# Altium PCB 四进四出三电机.PcbDoc (part 2 of 3)
Units mm, origin at the board's own origin, x right, y up, seen from the top; angles counter-clockwise.
Board outline 122.4 x 87.4 mm, 2 copper layers (Top Layer, Bottom Layer); 150 components, 163 nets, 541 pads, 64 vias.
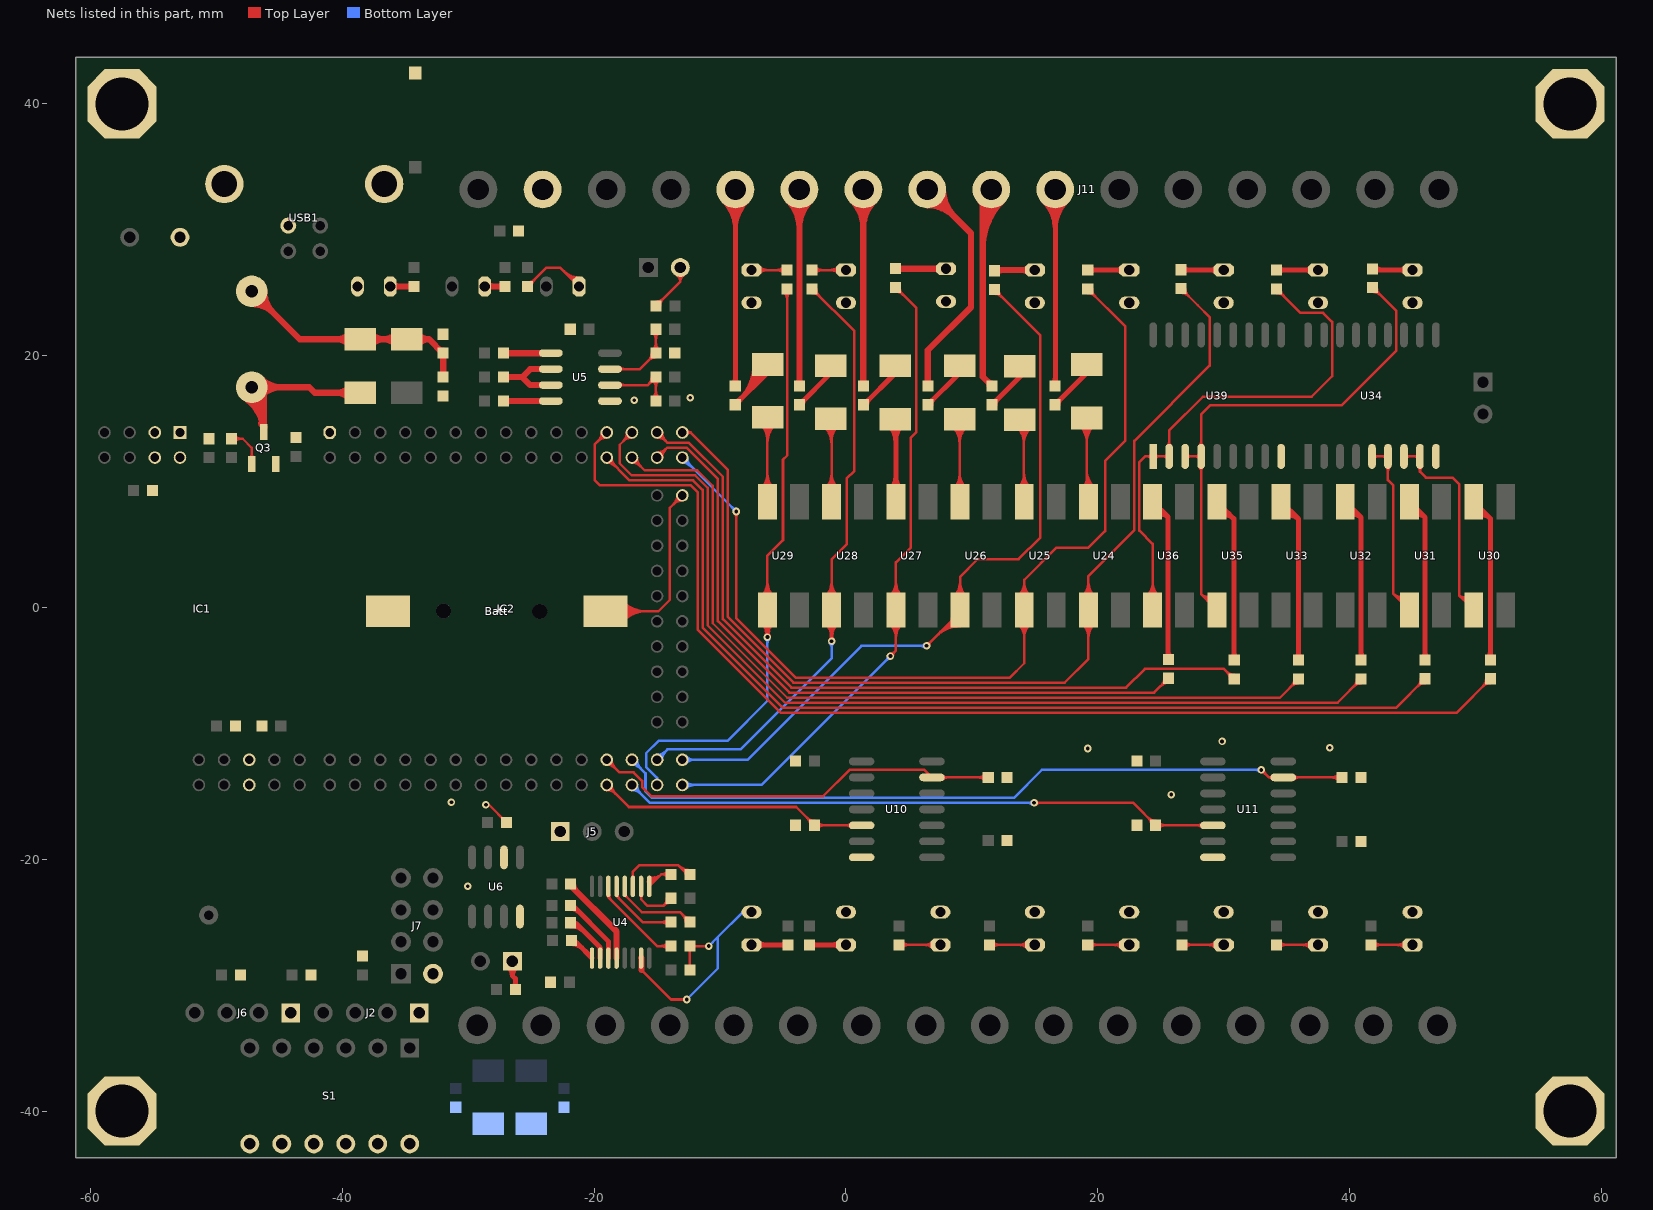
[diagram p2: the nets of this part, all layers, seen from the top]

## Via types
v1: diameter 0.6, hole 0.3, Top Layer to Bottom Layer, 64 vias

## Nets (pads, with @x,y where several pads share a name; then routed paths per layer and width w, separated by ;. In a path a pad name is that pad's centre, name@x,y a point inside that pad or via, vN(x,y) a via of type N, cw(c..) or ccw(c..) an arc to the next point about the centre after c; other vN are vias at no path point) (continued)
GND: Batt.2 C1.2 C2.2 C3.2 C4.2 C5.2 C6.2 C7.2 C8.2 C9.2 C18.2 C19.2 C20.2 C24.2 C25.1 C26.1 C27.2 C28.1 C29.1 D1.A D2.A IC1.2 IC1.4 IC1.5 IC2.1 J2.1 J5.1 J6.1 J7.1 LED1.K LED10.K LED11.K LED12.K LED13.K LED14.K LED15.K LED16.K LED17.K LED30.K LED31.K LED32.K LED33.K LED34.K LED35.K LED36.K LED37.K PAD1.1 PAD2.1 PAD3.1 PAD4.1 POWER.1 Q3.2 R11.2 R14.1 R43.2 R44.2 R45.2 R46.2 R47.2 R48.2 R49.2 R50.2 S1.7 S1.8 S1.9 S1.10 S1.11 S1.12 S2.2 U4.15 U5.5 U6.2 U6.8 U10.7 U11.7 U34.9 U39.9 USB1.4 USB1.5 USB1.6 | length 21.6
  Top Layer w0.2: v1(-28.6,-15.672) -28.372,-15.672 C28.1@-26.975,-17.069 ; -16.25,-28.784 -13.893,-31.14 v1(-12.649,-31.14) ; C3.2@-12.4,-28.8 C24.2@-12.4,-26.9 v1(-10.898,-26.9)
  Top Layer w0.5: U4.15@-16.275,-27.85 -16.25,-27.875 -16.25,-28.784
  Bottom Layer w0.2: v1(-12.649,-31.14) -10.185,-28.677 -10.185,-26.187 ; v1(-10.898,-26.9) -10.185,-26.187 ; LED10.K@-7.5,-24.2 -8.198,-24.2 -10.185,-26.187
  other v1: -30.048,-22.149 -31.344,-15.469 25.832,-14.859 19.202,-11.201 38.43,-11.151 29.87,-10.643 -16.815,16.459 -12.37,16.662
INPUT1: J11.7 R64.2 | length 24.9
  Top Layer w0.4: J11.7@15.701,32.281 cw(c13.46,30.04) 16.629,30.04 ; J11.7@15.984,32.564 cw(c14.426,31.006) 16.629,31.006 ; R64.2@16.43,17.77 ccw(c15.951,18.249) 16.629,18.249 ; R64.2@16.6,17.6 16.629,17.629 16.629,33.191 J11.7@16.62,33.2 ; 16.629,18.109 ccw(c17.109,18.109) R64.2@16.77,17.77 ; 16.629,30.083 cw(c19.737,30.083) J11.7@17.539,32.281 ; 16.629,31.049 cw(c18.771,31.049) J11.7@17.256,32.564
INPUT2: J11.8 R65.2 | length 27.1
  Top Layer w0.5: J11.8@10.656,32.316 cw(c10.137,31.797) 10.871,31.797 ; 10.871,28.568 cw(c16.172,28.568) J11.8@12.424,32.316 ; 10.871,29.775 cw(c14.965,29.775) J11.8@12.07,32.67 ; 10.871,30.982 cw(c13.758,30.982) J11.8@11.717,33.023 ; R65.2@11.41,17.6 ccw(c10.951,17.6) 11.276,17.924 ccw(c11.6,18.249) R65.2@11.6,17.79 ; J11.8@11.54,33.2 10.871,32.531 10.871,18.329 R65.2@11.6,17.6
INPUT3: J11.9 R66.2 | length 26.8
  Top Layer w0.5: R66.2@6.366,17.734 ccw(c6.041,18.059) 6.5,18.059 ccw(c6.959,18.059) R66.2@6.634,17.734 ; J11.9@6.46,31.95 cw(c6.46,28.932) 8.594,31.066 cw(c10.728,33.2) J11.9@7.71,33.2 ; J11.9@6.46,32.45 cw(c6.46,30.639) 7.74,31.92 cw(c9.021,33.2) J11.9@7.21,33.2 ; J11.9@6.46,33.2 9.931,29.729 9.931,23.851 6.5,20.419 R66.2@6.5,17.6
INPUT4: J11.10 R67.2 | length 23.6
  Top Layer w0.5: J11.10@0.496,32.316 cw(c-1.638,30.182) 1.38,30.182 cw(c4.398,30.182) J11.10@2.264,32.316 ; J11.10@0.85,32.67 cw(c-0.431,31.389) 1.38,31.389 cw(c3.191,31.389) J11.10@1.91,32.67 ; R67.2@1.38,17.62 J11.10@1.38,33.2 ; 1.38,18.107 ccw(c1.907,18.107) R67.2@1.534,17.734
INPUT5: J11.11 R68.2 | length 23.9
  Top Layer w0.5: J11.11@-4.584,32.316 cw(c-6.718,30.182) -3.7,30.182 cw(c-0.682,30.182) J11.11@-2.816,32.316 ; J11.11@-4.23,32.67 cw(c-5.511,31.389) -3.7,31.389 cw(c-1.889,31.389) J11.11@-3.17,32.67 ; R68.2@-3.834,17.734 ccw(c-4.159,18.059) -3.7,18.059 ccw(c-3.241,18.059) R68.2@-3.566,17.734 ; R68.2@-3.7,17.6 J11.11@-3.7,33.2
INPUT6: J11.12 R69.2 | length 24.9
  Top Layer w0.4: J11.12@-9.699,32.281 cw(c-11.918,30.062) -8.78,30.062 cw(c-5.642,30.062) J11.12@-7.861,32.281 ; J11.12@-9.416,32.564 cw(c-10.953,31.027) -8.78,31.027 cw(c-6.607,31.027) J11.12@-8.144,32.564 ; R69.2@-8.97,17.77 ccw(c-9.428,18.228) -8.78,18.228 ; R69.2@-8.8,17.6 -8.78,17.62 J11.12@-8.78,33.2 ; -8.78,18.131 ccw(c-8.269,18.131) R69.2@-8.63,17.77
IO1: IC2.58 R47.1 U10.5 | length 26.4
  Top Layer w0.2: IC2.58@-19,-14.5 cw(c-19,-15.466) -18.317,-14.783 cw(c-17.634,-14.1) IC2.58@-18.6,-14.1 ; IC2.58@-19,-14.1 -17.25,-15.85 -3.95,-15.85 R47.1@-2.5,-17.3 1.23,-17.3 U10.5@1.242,-17.312 ; R47.1@-2.84,-17.3 ccw(c-3.661,-17.3) -3.08,-16.72 ccw(c-2.5,-16.139) R47.1@-2.5,-16.96 ; R47.1@-2.26,-17.54 cw(c-1.679,-18.121) -1.679,-17.3 cw(c-1.679,-16.479) R47.1@-2.26,-17.06 ; 0.007,-17.3 cw(c0.007,-17.835) U10.5@0.386,-17.457 ; 0.065,-17.3 ccw(c0.065,-16.847) U10.5@0.386,-17.167
IO2: IC2.57 R48.1 U10.13 | length 36.5
  Top Layer w0.2: IC2.57@-19,-12.5 cw(c-19,-13.466) -18.317,-12.783 cw(c-17.634,-12.1) IC2.57@-18.6,-12.1 ; IC2.57@-19,-12.1 -17.994,-13.106 -16.862,-13.106 -16.2,-13.769 -16.2,-13.89 -16.2,-14.133 -16.2,-14.255 -15.469,-14.986 -1.809,-14.986 0.28,-12.897 6.225,-12.897 U10.13@6.83,-13.502 11.298,-13.502 R48.1@11.3,-13.5 ; U10.13@7.686,-13.647 cw(c8.036,-13.996) 8.036,-13.502 cw(c8.036,-13.008) U10.13@7.686,-13.357 ; 10.474,-13.502 ccw(c10.474,-12.674) R48.1@11.06,-13.26 ; 10.484,-13.502 cw(c10.484,-14.316) R48.1@11.06,-13.74
IO3: IC2.56 R49.1 U11.5 | length 53.9
  Top Layer w0.2: v1(14.935,-15.519) 22.819,-15.519 R49.1@24.6,-17.3 29.13,-17.3 U11.5@29.142,-17.312 ; v1@15.077,-15.661 cw(c15.418,-16.002) 15.418,-15.519 cw(c15.418,-15.037) v1@15.077,-15.378 ; R49.1@24.26,-17.3 ccw(c23.439,-17.3) 24.02,-16.72 ccw(c24.6,-16.139) R49.1@24.6,-16.96 ; R49.1@24.84,-17.54 cw(c25.421,-18.121) 25.421,-17.3 cw(c25.421,-16.479) R49.1@24.84,-17.06 ; 27.907,-17.3 cw(c27.907,-17.835) U11.5@28.286,-17.457 ; 27.965,-17.3 ccw(c27.965,-16.847) U11.5@28.286,-17.167
  Bottom Layer w0.2: IC2.56@-17,-14.5 cw(c-17,-15.466) -16.317,-14.783 cw(c-15.634,-14.1) IC2.56@-16.6,-14.1 ; IC2.56@-17,-14.1 -15.581,-15.519 v1(14.935,-15.519) ; v1@14.794,-15.661 ccw(c14.452,-16.002) 14.452,-15.519 ccw(c14.452,-15.037) v1@14.794,-15.378
IO4: IC2.55 R50.1 U11.13 | length 65.4
  Top Layer w0.2: v1@32.991,-13.1 cw(c32.991,-13.583) 33.333,-13.241 cw(c33.674,-12.9) v1@33.191,-12.9 ; v1(32.991,-12.9) 33.593,-13.502 ; U11.13@33.859,-13.63 ccw(c33.593,-13.841) 33.593,-13.502 ; U11.13@33.859,-13.374 cw(c33.593,-13.163) 33.593,-13.502 ; U11.13@35.586,-13.647 cw(c35.936,-13.996) 35.936,-13.502 cw(c35.936,-13.008) U11.13@35.586,-13.357 ; 38.574,-13.502 ccw(c38.574,-12.674) R50.1@39.16,-13.26 ; 38.584,-13.502 cw(c38.584,-14.316) R50.1@39.16,-13.74 ; R50.1@39.4,-13.5 39.398,-13.502 U11.13@34.73,-13.502 33.593,-13.502
  Bottom Layer w0.2: IC2.55@-17,-12.5 cw(c-17,-13.466) -16.317,-12.783 cw(c-15.634,-12.1) IC2.55@-16.6,-12.1 ; IC2.55@-17,-12.1 -15.926,-13.174 -15.926,-14.608 -15.415,-15.119 13.329,-15.119 15.548,-12.9 v1(32.991,-12.9) ; v1@32.85,-13.041 ccw(c32.509,-13.383) 32.509,-12.9 ccw(c32.509,-12.417) v1@32.85,-12.759
IO5: IC2.54 R28.1 U29.3 | length 60.9
  Top Layer w0.2: U29.3@-6.7,0.91 ccw(c-7.809,2.019) -6.24,2.019 ccw(c-4.671,2.019) U29.3@-5.78,0.91 ; U29.3@-6.685,-1.323 cw(c-7.654,-2.354) v1(-6.24,-2.354) cw(c-4.826,-2.354) U29.3@-5.795,-1.323 ; U29.3@-6.558,0.768 ccw(c-7.326,1.536) -6.24,1.536 ccw(c-5.154,1.536) U29.3@-5.922,0.768 ; U29.3@-6.548,-1.178 cw(c-7.219,-1.891) -6.24,-1.891 cw(c-5.261,-1.891) U29.3@-5.932,-1.178 ; v1@-6.413,-2.254 ccw(c-6.831,-2.012) -6.365,-1.887 ccw(c-5.899,-1.762) v1@-6.14,-2.181 ; v1@-6.381,-2.212 ccw(c-6.723,-1.871) -6.24,-1.871 ccw(c-5.757,-1.871) v1@-6.099,-2.212 ; v1@-6.34,-2.181 ccw(c-6.581,-1.762) -6.115,-1.887 ccw(c-5.649,-2.012) v1@-6.067,-2.254 ; v1(-6.24,-2.354) U29.3@-6.24,-0.2 -6.24,4.117 -5.004,5.353 -5.004,11.737 -4.65,12.09 -4.65,25.25 R28.1@-4.7,25.3 ; R28.1@-4.94,25.06 cw(c-5.642,24.358) -4.65,24.358 ; R28.1@-4.799,25.201 cw(c-5.159,24.841) -4.65,24.841 ; -4.65,24.6 cw(c-4,24.6) R28.1@-4.46,25.06
  Bottom Layer w0.2: IC2.54@-15.133,-13.723 ccw(c-15.2,-13.534) -15,-13.534 ; IC2.54@-15,-14.1 -15,-13.534 ; IC2.54@-14.867,-13.723 cw(c-14.8,-13.534) -15,-13.534 ; v1@-6.381,-2.495 cw(c-6.723,-2.837) -6.24,-2.837 cw(c-5.757,-2.837) v1@-6.099,-2.495 ; v1(-6.24,-2.354) -6.24,-7.408 -9.423,-10.592 -14.884,-10.592 -15.875,-11.582 -15.875,-12.659 -15,-13.534
IO6: IC2.53 R27.1 U28.3 | length 62.9
  Top Layer w0.2: R27.1@-2.692,24.958 cw(c-2.692,24.138) -2.112,24.718 cw(c-1.532,25.298) R27.1@-2.352,25.298 ; R27.1@-2.692,25.298 0.66,21.946 0.66,10.845 0.051,10.236 0.051,5.004 -1.14,3.813 U28.3@-1.14,-0.2 -1.143,-0.203 v1(-1.143,-2.692) ; U28.3@-1.6,-1.31 cw(c-2.702,-2.412) v1@-1.143,-2.412 ; U28.3@-1.6,0.91 ccw(c-2.709,2.019) -1.14,2.019 ccw(c0.429,2.019) U28.3@-0.68,0.91 ; U28.3@-1.458,-1.168 cw(c-2.219,-1.929) -1.143,-1.929 ; U28.3@-1.458,0.768 ccw(c-2.226,1.536) -1.14,1.536 ccw(c-0.054,1.536) U28.3@-0.822,0.768 ; v1@-1.31,-2.582 ccw(c-1.871,-2.21) -1.211,-2.076 ; v1@-1.284,-2.551 ccw(c-1.626,-2.21) -1.143,-2.21 ccw(c-0.66,-2.21) v1@-1.002,-2.551 ; v1@-1.253,-2.525 ccw(c-1.419,-2.275) -1.124,-2.335 ; -1.158,-2.34 ccw(c-0.871,-2.282) v1@-1.033,-2.526 ; v1@-1.143,-2.426 cw(c0.436,-2.426) U28.3@-0.68,-1.31 ; -1.143,-1.944 cw(c-0.046,-1.944) U28.3@-0.822,-1.168 ; -1.073,-2.082 ccw(c-0.421,-2.216) v1@-0.976,-2.582
  Bottom Layer w0.2: IC2.53@-15,-12.1 -14.178,-11.278 -8.382,-11.278 -1.143,-4.039 v1(-1.143,-2.692) ; IC2.53@-15,-11.7 ccw(c-15,-10.734) -14.317,-11.417 ccw(c-13.634,-12.1) IC2.53@-14.6,-12.1 ; v1@-1.284,-2.834 cw(c-1.626,-3.175) -1.143,-3.175 cw(c-0.66,-3.175) v1@-1.002,-2.834
IO7: IC2.52 R26.1 U27.3 | length 64.4
  Top Layer w0.2: U27.3@3.5,-1.31 cw(c2.391,-2.419) 3.96,-2.419 cw(c5.529,-2.419) U27.3@4.42,-1.31 ; U27.3@3.5,0.91 ccw(c2.391,2.019) 3.96,2.019 ccw(c5.529,2.019) U27.3@4.42,0.91 ; v1(3.531,-3.861) 3.96,-3.431 U27.3@3.96,-0.2 3.96,3.579 5.156,4.775 5.156,13.491 5.588,13.923 5.588,23.774 4.118,25.244 R26.1@3.756,25.244 ; v1@3.531,-3.661 ccw(c3.531,-3.178) 3.872,-3.519 ccw(c4.213,-3.861) v1@3.731,-3.861 ; U27.3@3.642,-1.168 cw(c2.874,-1.936) 3.96,-1.936 cw(c5.046,-1.936) U27.3@4.278,-1.168 ; U27.3@3.642,0.768 ccw(c2.874,1.536) 3.96,1.536 ccw(c5.046,1.536) U27.3@4.278,0.768 ; R26.1@3.937,25.085 cw(c3.937,24.265) 4.517,24.845 cw(c5.098,25.425) R26.1@4.277,25.425
  Bottom Layer w0.2: IC2.52@-13,-14.1 -6.709,-14.1 v1(3.531,-3.861) ; IC2.52@-12.717,-14.383 cw(c-12.034,-15.066) -12.034,-14.1 cw(c-12.034,-13.134) IC2.52@-12.717,-13.817 ; v1@3.331,-3.861 cw(c2.848,-3.861) 3.189,-4.202 cw(c3.531,-4.544) v1@3.531,-4.061
IO8: IC2.51 R25.1 U26.3 | length 74.2
  Top Layer w0.2: v1@6.401,-2.848 ccw(c6.401,-2.365) 6.742,-2.707 ccw(c7.084,-3.048) v1@6.601,-3.048 ; v1@6.426,-3.023 v1(6.401,-3.048) U26.3@9.06,-0.389 ; 7.163,-2.286 cw(c9.06,-4.183) U26.3@9.06,-1.5 ; 7.504,-1.944 cw(c9.06,-3.5) U26.3@9.06,-1.3 ; 7.846,-1.603 cw(c9.06,-2.817) U26.3@9.06,-1.1 ; 8.187,-1.261 cw(c9.06,-2.134) U26.3@9.06,-0.9 ; 8.277,-1.172 ccw(c7.954,-0.85) U26.3@8.41,-0.85 ; U26.3@8.6,0.91 ccw(c7.491,2.019) 9.06,2.019 ccw(c10.629,2.019) U26.3@9.52,0.91 ; U26.3@8.742,0.768 ccw(c7.974,1.536) 9.06,1.536 ccw(c10.146,1.536) U26.3@9.378,0.768 ; U26.3@9.06,-0.948 U26.3@9.06,-0.389 ; R25.1@11.786,24.908 cw(c11.786,24.087) 12.366,24.667 cw(c12.946,25.248) R25.1@12.126,25.248 ; R25.1@11.786,25.248 15.443,21.59 15.443,5.563 13.716,3.835 10.465,3.835 9.06,2.431 U26.3@9.06,-0.2 U26.3@9.06,-0.389
  Bottom Layer w0.2: IC2.51@-13,-12.1 -7.833,-12.1 1.219,-3.048 v1(6.401,-3.048) ; IC2.51@-12.717,-12.383 cw(c-12.034,-13.066) -12.034,-12.1 cw(c-12.034,-11.134) IC2.51@-12.717,-11.817 ; v1@6.259,-3.189 ccw(c5.918,-3.531) 5.918,-3.048 ccw(c5.918,-2.565) v1@6.259,-2.907
IO9: IC2.30 R24.1 U25.3 | length 88.3
  Top Layer w0.2: v1@-8.861,7.479 cw(c-9.203,7.137) -8.72,7.137 cw(c-8.237,7.137) v1@-8.579,7.479 ; v1(-8.72,7.62) -8.72,-0.844 -8.725,-0.85 -4.005,-5.569 13.023,-5.569 14.16,-4.433 U25.3@14.16,-0.2 14.16,2.197 16.713,4.75 19.26,4.75 20.574,6.064 20.574,11.633 22.2,13.259 22.2,22.3 R24.1@19.2,25.3 ; U25.3@13.7,-1.31 cw(c12.591,-2.419) 14.16,-2.419 cw(c15.729,-2.419) U25.3@14.62,-1.31 ; U25.3@13.7,0.91 ccw(c12.591,2.019) 14.16,2.019 ccw(c15.729,2.019) U25.3@14.62,0.91 ; U25.3@13.842,-1.168 cw(c13.074,-1.936) 14.16,-1.936 cw(c15.246,-1.936) U25.3@14.478,-1.168 ; U25.3@13.842,0.768 ccw(c13.074,1.536) 14.16,1.536 ccw(c15.246,1.536) U25.3@14.478,0.768 ; R24.1@19.2,24.96 cw(c19.2,24.139) 19.78,24.72 cw(c20.361,25.3) R24.1@19.54,25.3
  Bottom Layer w0.2: IC2.30@-13,11.5 cw(c-13,10.534) -12.317,11.217 cw(c-11.634,11.9) IC2.30@-12.6,11.9 ; IC2.30@-13,11.9 v1(-8.72,7.62) ; v1@-8.92,7.62 ccw(c-9.403,7.62) -9.061,7.961 ccw(c-8.72,8.303) v1@-8.72,7.82
IO10: IC2.29 R23.1 U24.3 | length 92.8
  Top Layer w0.2: IC2.29@-13,13.9 -12.351,13.9 ; IC2.29@-12.643,13.72 cw(c-12.351,13.573) -12.351,13.9 ; IC2.29@-12.643,14.08 ccw(c-12.351,14.227) -12.351,13.9 ; U24.3@18.8,-1.31 cw(c17.691,-2.419) 19.26,-2.419 cw(c20.829,-2.419) U24.3@19.72,-1.31 ; U24.3@18.8,0.91 ccw(c17.691,2.019) 19.26,2.019 ccw(c20.829,2.019) U24.3@19.72,0.91 ; U24.3@18.942,-1.168 cw(c18.174,-1.936) 19.26,-1.936 cw(c20.346,-1.936) U24.3@19.578,-1.168 ; U24.3@18.942,0.768 ccw(c18.174,1.536) 19.26,1.536 ccw(c20.346,1.536) U24.3@19.578,0.768 ; R23.1@26.619,24.984 cw(c26.619,24.163) 27.2,24.743 cw(c27.78,25.324) R23.1@26.959,25.324 ; R23.1@26.619,25.324 27.94,24.003 28.88,23.063 28.88,19.202 22.91,13.233 22.91,6.146 19.26,2.496 U24.3@19.26,-0.2 19.26,-4.083 17.373,-5.969 -4.171,-5.969 -9.384,-0.757 -9.384,10.933 -12.351,13.9
IO11: IC2.28 R75.1 | length 58.9
  Top Layer w0.2: IC2.28@-15,11.9 -14.2,12.7 -12.669,12.7 -10.184,10.215 -10.184,-1.088 -4.502,-6.769 24.481,-6.769 R75.1@25.625,-5.625 ; IC2.28@-15,12.3 ccw(c-15,13.266) -14.317,12.583 ccw(c-13.634,11.9) IC2.28@-14.6,11.9 ; R75.1@25.285,-5.625 cw(c24.464,-5.625) 25.045,-6.205 cw(c25.625,-6.786) R75.1@25.625,-5.965
IO12: IC2.27 R74.1 | length 64.6
  Top Layer w0.2: IC2.27@-15,13.5 cw(c-15,12.534) -14.317,13.217 cw(c-13.634,13.9) IC2.27@-14.6,13.9 ; IC2.27@-15,13.9 -14.2,13.1 -12.503,13.1 -9.784,10.381 -9.784,-0.922 -4.336,-6.369 22.256,-6.369 23.749,-4.877 30.023,-4.877 R74.1@30.836,-5.69 ; R74.1@30.496,-5.69 ccw(c29.675,-5.69) 30.255,-5.109 ccw(c30.836,-4.529) R74.1@30.836,-5.35
IO13: IC2.26 R70.1 | length 70.7
  Top Layer w0.2: IC2.26@-17,11.5 cw(c-17,10.534) -16.317,11.217 cw(c-15.634,11.9) IC2.26@-16.6,11.9 ; IC2.26@-17,11.9 -16,10.9 -11.819,10.9 -10.584,9.665 -10.584,-1.254 -4.668,-7.169 34.461,-7.169 R70.1@35.941,-5.69 ; R70.1@35.601,-5.69 cw(c34.78,-5.69) 35.361,-6.27 cw(c35.941,-6.85) R70.1@35.941,-6.03
IO14: IC2.25 R71.1 | length 79.6
  Top Layer w0.2: IC2.25@-17.4,13.9 cw(c-18.366,13.9) -17.683,13.217 cw(c-17,12.534) IC2.25@-17,13.5 ; IC2.25@-17,13.9 -17.974,12.926 -17.974,11.439 -17.034,10.5 -11.985,10.5 -10.984,9.499 -10.984,-1.419 -4.834,-7.569 39.04,-7.569 R71.1@40.919,-5.69 ; R71.1@40.579,-5.69 cw(c39.759,-5.69) 40.339,-6.27 cw(c40.919,-6.85) R71.1@40.919,-6.03
IO15: IC2.24 R72.1 | length 83.4
  Top Layer w0.2: IC2.24@-19,11.5 cw(c-19,10.534) -18.317,11.217 cw(c-17.634,11.9) IC2.24@-18.6,11.9 ; IC2.24@-19,11.9 -17.2,10.1 -12.15,10.1 -11.384,9.333 -11.384,-1.585 -4.999,-7.969 43.694,-7.969 R72.1@45.999,-5.664 ; R72.1@45.659,-5.664 cw(c44.839,-5.664) 45.419,-6.245 cw(c45.999,-6.825) R72.1@45.999,-6.004
IO16: IC2.23 R73.1 | length 93.3
  Top Layer w0.2: IC2.23@-19.4,13.9 cw(c-20.366,13.9) -19.683,13.217 cw(c-19,12.534) IC2.23@-19,13.5 ; IC2.23@-19,13.9 -19.964,12.936 -19.964,10.135 -19.53,9.7 -12.316,9.7 -11.784,9.167 -11.784,-1.751 -5.165,-8.369 48.476,-8.369 R73.1@51.181,-5.664 ; R73.1@50.841,-5.664 cw(c50.02,-5.664) 50.601,-6.245 cw(c51.181,-6.825) R73.1@51.181,-6.004
NetBATT1_1: Batt.1 IC2.32 | length 28.6
  Top Layer w0.2: Batt.1@-19.09,-0.307 -19.083,-0.3 -14.905,-0.3 -14.001,0.604 -14.001,7.899 IC2.32@-13,8.9 ; Batt.1@-18.202,-0.696 cw(c-17.245,-1.652) -17.245,-0.3 ; Batt.1@-18.202,0.082 ccw(c-17.28,1.003) -17.28,-0.3 ; Batt.1@-18.06,-0.837 cw(c-16.762,-2.135) -16.762,-0.3 ; Batt.1@-18.06,0.223 ccw(c-16.797,1.486) -16.797,-0.3 ; Batt.1@-17.919,-0.979 cw(c-16.28,-2.618) -16.28,-0.3 ; Batt.1@-17.919,0.365 ccw(c-16.314,1.969) -16.314,-0.3 ; Batt.1@-17.777,-1.12 cw(c-15.797,-3.101) -15.797,-0.3 ; Batt.1@-17.777,0.506 ccw(c-15.831,2.452) -15.831,-0.3 ; IC2.32@-13.4,8.9 cw(c-14.366,8.9) -13.683,8.217 cw(c-13,7.534) IC2.32@-13,8.5
NetC18_1: C18.1 C19.1 D8.K D9.K U3.1 | length 34.2
  Top Layer w0.5: U3.1@-47.2,24.11 cw(c-47.2,21.696) -45.493,23.403 cw(c-43.786,25.11) U3.1@-46.2,25.11 ; U3.1@-47.2,25.11 -43.39,21.3 D8.K@-38.575,21.3 D9.K@-34.875,21.3 -33.116,21.3 ; D8.K@-39.385,20.84 ccw(c-40.494,19.731) -40.494,21.3 ccw(c-40.494,22.869) D8.K@-39.385,21.76 ; D8.K@-37.765,20.84 cw(c-36.656,19.731) -36.656,21.3 cw(c-36.656,22.869) D8.K@-37.765,21.76 ; D9.K@-35.685,20.84 ccw(c-36.794,19.731) -36.794,21.3 ccw(c-36.794,22.869) D9.K@-35.685,21.76 ; D9.K@-34.03,20.878 cw(c-33.116,20.099) -33.116,21.3 ; D9.K@-34.03,21.722 ccw(c-33.116,22.501) -33.116,21.3 ; C19.1@-32.352,20.536 ccw(c-32,20.888) C19.1@-32,20.39 ; C18.1@-32.134,18.434 ccw(c-32.459,18.759) -32,18.759 ccw(c-31.541,18.759) C18.1@-31.866,18.434 ; C19.1@-32.134,20.066 cw(c-32.459,19.741) -32,19.741 cw(c-31.541,19.741) C19.1@-31.866,20.066 ; C18.1@-32,18.3 C19.1@-32,20.2 -32.016,20.2 -33.116,21.3
NetC21_1: C21.1 U4.1 | length 5.8
  Top Layer w0.2: U4.1@-15.736,-21.78 ccw(c-15.535,-21.228) -15.119,-21.644 ; U4.1@-15.668,-21.592 ccw(c-15.416,-20.903) -14.897,-21.422 ; U4.1@-15.625,-22.15 -14.675,-21.2 ; U4.1@-15.599,-21.405 ccw(c-15.298,-20.577) -14.675,-21.2 ; C21.1@-14.15,-21.43 ccw(c-14.675,-21.913) -14.675,-21.2 ; C21.1@-14.15,-20.97 cw(c-14.675,-20.487) -14.675,-21.2 ; C21.1@-13.9,-21.2 -14.675,-21.2
NetC21_2: C21.2 U4.3 | length 8.4
  Top Layer w0.2: U4.3@-16.978,-21.422 ccw(c-17.106,-21.294) -16.925,-21.294 ccw(c-16.744,-21.294) U4.3@-16.872,-21.422 ; U4.3@-16.925,-22.15 -16.925,-20.985 -16.4,-20.46 -13.336,-20.46 -12.596,-21.2 C21.2@-12.4,-21.2 ; -13.315,-20.481 ccw(c-12.4,-19.567) C21.2@-12.4,-20.86 ; -12.973,-20.823 ccw(c-12.4,-20.25) C21.2@-12.4,-21.06 ; -12.842,-20.954 cw(c-13.088,-21.2) C21.2@-12.74,-21.2
NetC22_1: C22.1 U4.5 | length 7.6
  Top Layer w0.2: U4.5@-18.225,-22.15 -18.225,-22.923 -16.148,-25 C22.1@-13.9,-25 ; U4.5@-18.15,-22.825 ccw(c-17.732,-22.825) -18.028,-23.12 ; C22.1@-14.14,-25.24 ccw(c-14.721,-25.821) -14.721,-25 ccw(c-14.721,-24.179) C22.1@-14.14,-24.76
NetC22_2: C22.2 U4.4 | length 8.2
  Top Layer w0.2: U4.4@-17.575,-22.15 -17.575,-22.847 -16.222,-24.2 -13.2,-24.2 C22.2@-12.4,-25 ; U4.4@-17.5,-22.825 ccw(c-17.267,-22.825) -17.432,-22.99 ; C22.2@-12.74,-25 ccw(c-13.561,-25) -12.98,-24.42 ccw(c-12.4,-23.839) C22.2@-12.4,-24.66
NetC23_1: C23.1 U4.2 | length 5.4
  Top Layer w0.2: U4.2@-16.328,-22.878 cw(c-16.456,-23.006) -16.275,-23.006 cw(c-16.094,-23.006) U4.2@-16.222,-22.878 ; U4.2@-16.275,-22.15 -16.275,-23.175 -15.75,-23.7 -14.5,-23.7 C23.1@-13.9,-23.1 ; C23.1@-14.24,-23.1 cw(c-15.061,-23.1) -14.48,-23.68 cw(c-13.9,-24.261) C23.1@-13.9,-23.44
NetC24_1: C24.1 U4.6 | length 9.6
  Top Layer w0.2: U4.6@-18.928,-22.878 cw(c-19.056,-23.006) -18.875,-23.006 cw(c-18.694,-23.006) U4.6@-18.822,-22.878 ; U4.6@-18.875,-22.15 -18.875,-23.035 -15.01,-26.9 C24.1@-13.9,-26.9 ; U4.6@-18.8,-22.825 ccw(c-18.112,-22.825) -18.598,-23.312 ; C24.1@-14.14,-27.14 ccw(c-14.721,-27.721) -14.721,-26.9 ccw(c-14.721,-26.079) C24.1@-14.14,-26.66
NetD8_A: D8.A Q3.3 U3.2 | length 30.3
  Top Layer w0.5: U3.2@-47.756,16.659 cw(c-49.661,13.811) Q3.3@-46.235,13.811 ; U3.2@-47.478,17.074 cw(c-49.035,14.747) -46.235,14.747 ; U3.2@-46.922,17.906 cw(c-47.782,16.619) -46.235,16.619 ; U3.2@-46.739,16.603 cw(c-46.54,16.22) -46.235,16.525 ; U3.2@-46.493,16.783 cw(c-44.786,15.076) -44.786,17.49 cw(c-44.786,19.904) U3.2@-46.493,18.197 ; -46.457,14.64 ccw(c-45.945,14.778) Q3.3@-46.21,14.318 ; U3.2@-46.313,17.029 ccw(c-45.93,16.83) -46.235,16.525 ; Q3.3@-46.235,13.94 -46.235,16.525 ; -46.235,15.683 ccw(c-48.408,15.683) U3.2@-47.2,17.49 ; D8.A@-39.385,16.59 ccw(c-40.494,15.481) -40.494,17.05 ccw(c-40.494,18.619) D8.A@-39.385,17.51 ; D8.A@-38.575,17.05 -42.196,17.05 -42.636,17.49 U3.2@-47.2,17.49 ; U3.2@-47.2,17.49 -46.235,16.525
NetD24_A: D24.A U24.2 | length 18.3
  Top Layer w0.2: D24.A@18.559,14.484 cw(c17.194,13.119) 19.125,13.119 cw(c21.056,13.119) D24.A@19.691,14.484 ; D24.A@18.701,14.626 cw(c17.676,13.601) 19.125,13.601 cw(c20.574,13.601) D24.A@19.549,14.626 ; U24.2@18.8,9.51 ccw(c18.017,10.293) 19.125,10.293 ; D24.A@18.842,14.767 cw(c18.159,14.084) 19.125,14.084 cw(c20.091,14.084) D24.A@19.408,14.767 ; U24.2@18.942,9.368 ccw(c18.5,9.81) 19.125,9.81 ; U24.2@19.125,8.535 D24.A@19.125,15.05 ; 19.125,9.979 ccw(c20.189,9.979) U24.2@19.437,9.227 ; 19.125,10.462 ccw(c20.672,10.462) U24.2@19.578,9.368 ; 19.125,10.945 ccw(c21.155,10.945) U24.2@19.72,9.51
NetD24_K: D24.K R64.1 | length 5.2
  Top Layer w0.4: R64.1@16.6,16.1 19.125,18.625 D24.K@19.125,19.3 ; R64.1@16.6,16.34 ccw(c16.6,16.919) 17.01,16.51 ccw(c17.419,16.1) R64.1@16.84,16.1
NetD25_A: D25.A U25.2 | length 17.6
  Top Layer w0.2: D25.A@13.578,14.357 cw(c12.256,13.035) 14.125,13.035 ; U25.2@13.7,9.51 ccw(c12.675,10.535) 14.125,10.535 ; D25.A@13.719,14.498 cw(c12.739,13.518) 14.125,13.518 ; U25.2@13.842,9.368 ccw(c13.158,10.052) 14.125,10.052 ; D25.A@13.861,14.64 cw(c13.222,14.001) 14.125,14.001 ; 14.125,10.221 ccw(c15.331,10.221) U25.2@14.478,9.368 ; 14.125,10.704 ccw(c15.814,10.704) U25.2@14.62,9.51 ; 14.125,12.947 cw(c16.119,12.947) D25.A@14.709,14.357 ; 14.125,13.429 cw(c15.636,13.429) D25.A@14.568,14.498 ; 14.125,13.912 cw(c15.153,13.912) D25.A@14.426,14.64 ; D25.A@14.125,14.95 14.125,8.435 U25.2@14.16,8.4
NetD25_K: D25.K R65.1 | length 5.1
  Top Layer w0.4: R65.1@11.6,16.1 14.125,18.625 D25.K@14.125,19.2 ; R65.1@11.6,16.34 ccw(c11.6,16.919) 12.01,16.51 ccw(c12.419,16.1) R65.1@11.84,16.1
NetD26_A: D26.A U26.2 | length 17.6
  Top Layer w0.2: D26.A@8.459,14.384 cw(c7.094,13.019) 9.025,13.019 cw(c10.956,13.019) D26.A@9.591,14.384 ; U26.2@8.6,9.51 ccw(c7.575,10.535) 9.025,10.535 ; D26.A@8.601,14.526 cw(c7.576,13.501) 9.025,13.501 cw(c10.474,13.501) D26.A@9.449,14.526 ; U26.2@8.742,9.368 ccw(c8.058,10.052) 9.025,10.052 ; D26.A@8.742,14.667 cw(c8.059,13.984) 9.025,13.984 cw(c9.991,13.984) D26.A@9.308,14.667 ; 9.025,10.221 ccw(c10.231,10.221) U26.2@9.378,9.368 ; 9.025,10.704 ccw(c10.714,10.704) U26.2@9.52,9.51 ; D26.A@9.025,14.95 9.025,8.435 U26.2@9.06,8.4
NetD26_K: D26.K R66.1 | length 5.1
  Top Layer w0.4: R66.1@6.5,16.1 9.025,18.625 D26.K@9.025,19.2 ; R66.1@6.5,16.34 ccw(c6.5,16.919) 6.91,16.51 ccw(c7.319,16.1) R66.1@6.74,16.1
NetD27_A: D27.A U27.2 | length 11.3
  Top Layer w0.4: D27.A@3.43,14.455 cw(c2.151,13.176) 3.96,13.176 ; U27.2@3.571,9.439 ccw(c2.632,10.378) 3.96,10.378 ccw(c5.288,10.378) U27.2@4.349,9.439 ; U27.2@3.96,8.4 D27.A@3.96,14.915 ; 3.96,13.345 cw(c5.53,13.345) D27.A@4.42,14.455
NetD27_K: D27.K R67.1 | length 5.1
  Top Layer w0.4: R67.1@1.4,16.1 3.925,18.625 D27.K@3.925,19.2 ; R67.1@1.4,16.34 ccw(c1.4,16.919) 1.81,16.51 ccw(c2.219,16.1) R67.1@1.64,16.1
NetD28_A: D28.A U28.2 | length 17
  Top Layer w0.2: D28.A@-1.766,14.434 cw(c-3.276,12.924) -1.14,12.924 ; D28.A@-1.624,14.576 cw(c-2.793,13.407) -1.14,13.407 ; U28.2@-1.6,9.51 ccw(c-2.709,10.619) -1.14,10.619 ccw(c0.429,10.619) U28.2@-0.68,9.51 ; D28.A@-1.483,14.717 cw(c-2.31,13.89) -1.14,13.89 ; U28.2@-1.458,9.368 ccw(c-2.226,10.136) -1.14,10.136 ccw(c-0.054,10.136) U28.2@-0.822,9.368 ; D28.A@-1.2,15 -1.14,14.94 U28.2@-1.14,8.4 ; -1.14,13.213 cw(c0.587,13.213) D28.A@-0.634,14.434 ; -1.14,13.696 cw(c0.104,13.696) D28.A@-0.776,14.576
NetD28_K: D28.K R68.1 | length 5
  Top Layer w0.4: R68.1@-3.7,16.1 -1.2,18.6 D28.K@-1.2,19.2 ; R68.1@-3.7,16.34 ccw(c-3.7,16.919) -3.29,16.51 ccw(c-2.881,16.1) R68.1@-3.46,16.1
NetD29_A: D29.A U29.2 | length 17
  Top Layer w0.2: D29.A@-6.766,14.534 cw(c-8.035,13.265) -6.24,13.265 ; U29.2@-6.7,9.51 ccw(c-7.809,10.619) -6.24,10.619 ccw(c-4.671,10.619) U29.2@-5.78,9.51 ; D29.A@-6.624,14.676 cw(c-7.552,13.748) -6.24,13.748 ; U29.2@-6.558,9.368 ccw(c-7.326,10.136) -6.24,10.136 ccw(c-5.154,10.136) U29.2@-5.922,9.368 ; U29.2@-6.24,8.4 D29.A@-6.24,15.06 ; -6.24,13.072 cw(c-4.172,13.072) D29.A@-5.634,14.534 ; -6.24,13.555 cw(c-4.655,13.555) D29.A@-5.776,14.676 ; -6.24,14.038 cw(c-5.138,14.038) D29.A@-5.917,14.817
NetD29_K: D29.K R69.1 | length 13
  Top Layer w0.4: R69.1@-8.839,16.337 ccw(c-8.979,17.202) -8.268,16.69 ; R69.1@-8.8,16.1 -6.2,18.7 D29.K@-6.2,19.3 ; R69.1@-8.8,16.34 ccw(c-8.8,16.919) -8.39,16.51 ccw(c-7.981,16.1) R69.1@-8.56,16.1 ; R69.1@-8.417,16.483 ccw(c-11.233,19.3) D29.K@-7.25,19.3 ; -7.734,17.166 ccw(c-9.868,19.3) D29.K@-6.85,19.3 ; -7.051,17.849 ccw(c-8.502,19.3) D29.K@-6.45,19.3
NetJ9_1: J9.1 R15.2 | length 4.9
  Top Layer w0.4: J9.1@-26.846,-28.527 cw(c-27.433,-29.253) -26.5,-29.253 ; J9.1@-26.5,-28.1 -26.5,-29.253 ; R15.2@-26.432,-30.183 ccw(c-26.842,-29.774) -26.262,-29.774 ccw(c-25.683,-29.774) R15.2@-26.092,-30.183 ; R15.2@-26.262,-30.353 -26.262,-29.491 -26.5,-29.253 ; J9.1@-26.154,-28.527 ccw(c-25.567,-29.253) -26.5,-29.253
NetLED1_A: LED1.A R1.2 | length 3.6
  Top Layer w0.5: LED1.A@-36.2,25.5 R1.2@-34.3,25.5 ; LED1.A@-36.018,25.318 cw(c-35.577,24.877) -35.577,25.5 cw(c-35.577,26.123) LED1.A@-36.018,25.682 ; R1.2@-34.434,25.366 ccw(c-34.759,25.041) -34.759,25.5 ccw(c-34.759,25.959) R1.2@-34.434,25.634
NetLED2_A: LED2.A R16.2 | length 3.3
  Top Layer w0.5: LED2.A@-28.7,25.5 R16.2@-27.1,25.5 ; LED2.A@-28.518,25.318 cw(c-28.077,24.877) -28.077,25.5 cw(c-28.077,26.123) LED2.A@-28.518,25.682 ; R16.2@-27.234,25.366 ccw(c-27.559,25.041) -27.559,25.5 ccw(c-27.559,25.959) R16.2@-27.234,25.634
NetLED3_A: LED3.A R17.2 | length 9.7
  Top Layer w0.2: R17.2@-25.3,25.5 -23.8,27 -22.7,27 LED3.A@-21.2,25.5 ; R17.2@-25.3,25.84 ccw(c-25.3,26.661) -24.72,26.08 ccw(c-24.139,25.5) R17.2@-24.96,25.5 ; -22.395,26.695 ccw(c-21.2,27.89) LED3.A@-21.2,26.2 ; -22.054,26.354 ccw(c-21.2,27.207) LED3.A@-21.2,26 ; -21.712,26.012 ccw(c-21.2,26.525) LED3.A@-21.2,25.8 ; LED3.A@-21.69,25.99 cw(c-21.888,25.792) LED3.A@-21.608,25.792
NetLED10_A: LED10.A R30.2 | length 5
  Top Layer w0.4: LED10.A@-7.5,-26.8 R30.2@-4.6,-26.8 ; LED10.A@-6.99,-27.018 cw(c-6.464,-27.544) -6.464,-26.8 cw(c-6.464,-26.056) LED10.A@-6.99,-26.582 ; R30.2@-4.77,-26.97 ccw(c-5.179,-27.379) -5.179,-26.8 ccw(c-5.179,-26.221) R30.2@-4.77,-26.63
NetLED11_A: LED11.A R31.2 | length 5
  Top Layer w0.4: R31.2@-2.9,-26.8 LED11.A@0,-26.8 ; R31.2@-2.73,-26.97 cw(c-2.321,-27.379) -2.321,-26.8 cw(c-2.321,-26.221) R31.2@-2.73,-26.63 ; LED11.A@-0.51,-27.018 ccw(c-1.036,-27.544) -1.036,-26.8 ccw(c-1.036,-26.056) LED11.A@-0.51,-26.582
NetLED12_A: LED12.A R32.2 | length 6.1
  Top Layer w0.2: R32.2@4.2,-26.8 LED12.A@7.5,-26.8 ; R32.2@4.44,-27.04 cw(c5.021,-27.621) 5.021,-26.8 cw(c5.021,-25.979) R32.2@4.44,-26.56 ; LED12.A@6.919,-27.089 ccw(c6.223,-27.785) 6.223,-26.8 ccw(c6.223,-25.815) LED12.A@6.919,-26.512
NetLED13_A: LED13.A R33.2 | length 6.4
  Top Layer w0.2: R33.2@11.4,-26.8 LED13.A@15,-26.8 ; R33.2@11.64,-27.04 cw(c12.221,-27.621) 12.221,-26.8 cw(c12.221,-25.979) R33.2@11.64,-26.56 ; LED13.A@14.419,-27.089 ccw(c13.723,-27.785) 13.723,-26.8 ccw(c13.723,-25.815) LED13.A@14.419,-26.512
NetLED14_A: LED14.A R34.2 | length 6.1
  Top Layer w0.2: R34.2@19.2,-26.8 LED14.A@22.5,-26.8 ; R34.2@19.44,-27.04 cw(c20.021,-27.621) 20.021,-26.8 cw(c20.021,-25.979) R34.2@19.44,-26.56 ; LED14.A@21.919,-27.089 ccw(c21.223,-27.785) 21.223,-26.8 ccw(c21.223,-25.815) LED14.A@21.919,-26.512
NetLED15_A: LED15.A R35.2 | length 6.1
  Top Layer w0.2: R35.2@26.7,-26.8 LED15.A@30,-26.8 ; R35.2@26.94,-27.04 cw(c27.521,-27.621) 27.521,-26.8 cw(c27.521,-25.979) R35.2@26.94,-26.56 ; LED15.A@29.419,-27.089 ccw(c28.723,-27.785) 28.723,-26.8 ccw(c28.723,-25.815) LED15.A@29.419,-26.512
NetLED16_A: LED16.A R36.2 | length 6.1
  Top Layer w0.2: R36.2@34.2,-26.8 LED16.A@37.5,-26.8 ; R36.2@34.44,-27.04 cw(c35.021,-27.621) 35.021,-26.8 cw(c35.021,-25.979) R36.2@34.44,-26.56 ; LED16.A@36.919,-27.089 ccw(c36.223,-27.785) 36.223,-26.8 ccw(c36.223,-25.815) LED16.A@36.919,-26.512
NetLED17_A: LED17.A R37.2 | length 6.1
  Top Layer w0.2: R37.2@41.7,-26.8 LED17.A@45,-26.8 ; R37.2@41.94,-27.04 cw(c42.521,-27.621) 42.521,-26.8 cw(c42.521,-25.979) R37.2@41.94,-26.56 ; LED17.A@44.419,-27.089 ccw(c43.723,-27.785) 43.723,-26.8 ccw(c43.723,-25.815) LED17.A@44.419,-26.512
NetLED30_A: LED30.A R21.2 | length 5.1
  Top Layer w0.4: R21.2@41.834,26.798 44.998,26.798 LED30.A@45,26.8 ; R21.2@42.004,27.07 ccw(c42.659,27.725) 42.659,26.798 ; 43.96,26.798 ccw(c43.96,27.547) LED30.A@44.49,27.018 ; 43.968,26.798 cw(c43.968,26.06) LED30.A@44.49,26.582
NetLED31_A: LED31.A R22.2 | length 5.4
  Top Layer w0.4: R22.2@34.2,26.8 LED31.A@37.5,26.8 ; R22.2@34.37,26.63 cw(c34.779,26.221) 34.779,26.8 cw(c34.779,27.379) R22.2@34.37,26.97 ; LED31.A@36.99,26.582 ccw(c36.464,26.056) 36.464,26.8 ccw(c36.464,27.544) LED31.A@36.99,27.018
NetLED32_A: LED32.A R23.2 | length 5.5
  Top Layer w0.4: R23.2@26.619,26.798 LED32.A@29.998,26.798 ; R23.2@26.789,26.654 cw(c27.137,26.306) 27.137,26.798 ; R23.2@26.789,26.994 ccw(c27.26,27.465) 27.26,26.798 ; 28.96,26.798 ccw(c28.96,27.547) LED32.A@29.49,27.018 ; 28.968,26.798 cw(c28.968,26.06) LED32.A@29.49,26.582
NetLED33_A: LED33.A R24.2 | length 5.4
  Top Layer w0.4: R24.2@19.2,26.8 LED33.A@22.5,26.8 ; R24.2@19.37,26.63 cw(c19.779,26.221) 19.779,26.8 cw(c19.779,27.379) R24.2@19.37,26.97 ; LED33.A@21.99,26.582 ccw(c21.464,26.056) 21.464,26.8 ccw(c21.464,27.544) LED33.A@21.99,27.018
NetLED34_A: LED34.A R25.2 | length 4.8
  Top Layer w0.5: R25.2@11.786,26.646 11.94,26.8 LED34.A@15,26.8 ; R25.2@11.92,26.613 cw(c12.371,26.162) 12.371,26.8 ; LED34.A@14.525,26.618 ccw(c14.085,26.177) 14.085,26.8 ccw(c14.085,27.423) LED34.A@14.525,26.982
NetLED35_A: LED35.A R26.2 | length 5.4
  Top Layer w0.5: R26.2@3.937,26.925 3.959,26.903 LED35.A@7.95,26.903 ; R26.2@4.071,27.06 ccw(c4.449,27.438) 4.449,26.903 ; LED35.A@7.476,26.721 ccw(c7.035,26.28) 7.035,26.903 ccw(c7.035,27.526) LED35.A@7.476,27.086
NetLED36_A: LED36.A R27.2 | length 5.5
  Top Layer w0.2: R27.2@-2.692,26.798 -0.002,26.798 LED36.A@0,26.8 ; R27.2@-2.452,26.558 cw(c-1.872,25.978) -1.872,26.798 cw(c-1.872,27.619) R27.2@-2.452,27.039 ; -1.281,26.798 ccw(c-1.281,27.789) LED36.A@-0.581,27.089 ; -1.273,26.798 cw(c-1.273,25.819) LED36.A@-0.581,26.512
NetLED37_A: LED37.A R28.2 | length 5.6
  Top Layer w0.2: LED37.A@-7.5,26.8 R28.2@-4.7,26.8 ; LED37.A@-6.919,26.512 cw(c-6.223,25.815) -6.223,26.8 cw(c-6.223,27.785) LED37.A@-6.919,27.089 ; R28.2@-4.94,26.56 ccw(c-5.521,25.979) -5.521,26.8 ccw(c-5.521,27.621) R28.2@-4.94,27.04
NetP1_2: P1.2 R485.1 | length 7.4
  Top Layer w0.2: R485.1@-15.088,23.952 -13.16,25.88 ; R485.1@-15.088,24.292 ccw(c-15.088,25.113) -14.507,24.533 ccw(c-13.927,23.952) R485.1@-14.748,23.952 ; P1.2@-13.483,26.436 cw(c-13.8,25.88) -13.16,25.88 ; P1.2@-13.383,26.609 cw(c-13.603,26.224) -13.16,26.224 cw(c-12.717,26.224) P1.2@-12.937,26.609 ; P1.2@-13.16,27 -13.16,25.88 ; P1.2@-12.837,26.436 ccw(c-12.52,25.88) -13.16,25.88
NetQ3_1: Q3.1 R2.2 | length 5.2
  Top Layer w0.2: R2.2@-48.8,13.4 -47.919,13.4 -47.2,12.681 Q3.1@-47.2,11.4 ; R2.2@-48.56,13.16 cw(c-47.979,12.579) -47.979,13.4 cw(c-47.979,14.221) R2.2@-48.56,13.64 ; Q3.1@-47.341,11.876 ccw(c-47.683,12.218) -47.2,12.218 ccw(c-46.717,12.218) Q3.1@-47.059,11.876
NetR3_2: R3.2 U4.12 | length 8
  Top Layer w0.5: R3.2@-21.995,-21.972 -18.225,-25.742 U4.12@-18.225,-27.85 ; R3.2@-21.678,-21.971 ccw(c-20.909,-21.971) -21.453,-22.515
NetR4_2: R4.2 U4.11 | length 6.4
  Top Layer w0.4: R4.2@-21.995,-23.622 -21.768,-23.622 -18.875,-26.515 U4.11@-18.875,-27.85 ; R4.2@-21.868,-23.913 cw(c-21.868,-24.857) -21.201,-24.189
NetR5_2: R5.2 U4.10 | length 5.4
  Top Layer w0.4: R5.2@-21.9,-25.1 -21.437,-25.1 -19.525,-27.012 U4.10@-19.525,-27.85 ; R5.2@-21.868,-25.284 cw(c-21.868,-26.771) -20.817,-25.72 ; -19.598,-26.939 cw(c-19.833,-27.175) U4.10@-19.5,-27.175
NetR6_2: R6.2 U4.9 | length 3.7
  Top Layer w0.4: R6.2@-21.817,-26.707 cw(c-21.817,-27.912) -20.965,-27.06 ; R6.2@-21.792,-26.67 -21.355,-26.67 ; R6.2@-21.666,-26.653 cw(c-21.52,-26.835) -21.355,-26.67 ; R6.2@-21.577,-26.457 ccw(c-21.355,-26.447) -21.355,-26.67 ; U4.9@-20.175,-27.85 -21.355,-26.67
NetR7_2: R7.2 U5.1 | length 4.5
  Top Layer w0.5: R7.2@-27.2,20.2 -23.455,20.2 U5.1@-23.45,20.205 ; R7.2@-27.066,20.066 cw(c-26.741,19.741) -26.741,20.2 cw(c-26.741,20.659) R7.2@-27.066,20.334
NetR8_2: R8.2 U5.2 U5.3 | length 7.3
  Top Layer w0.5: R8.2@-27.2,18.3 -25.705,18.3 ; R8.2@-27.066,18.166 cw(c-26.741,17.841) -26.741,18.3 cw(c-26.741,18.759) R8.2@-27.066,18.434 ; U5.3@-23.45,17.665 -25.07,17.665 -25.705,18.3 ; U5.2@-23.45,18.935 -25.07,18.935 -25.705,18.3
NetR9_2: R9.2 U5.4 | length 4.5
  Top Layer w0.5: R9.2@-27.2,16.4 -27.195,16.395 U5.4@-23.45,16.395 ; R9.2@-27.066,16.266 cw(c-26.753,15.953) -26.753,16.395 ; R9.2@-27.066,16.534 ccw(c-26.729,16.871) -26.729,16.395
NetR10_1: R10.1 R13.1 U5.6 | length 10.4
  Top Layer w0.2: U5.6@-18.75,17.665 -15.735,17.665 R10.1@-15.1,18.3 R13.1@-15.1,16.4 ; U5.6@-17.959,17.524 cw(c-17.617,17.182) -17.617,17.665 cw(c-17.617,18.148) U5.6@-17.959,17.806 ; R10.1@-15.44,18.3 cw(c-16.261,18.3) -15.68,17.72 cw(c-15.1,17.139) R10.1@-15.1,17.96 ; R13.1@-15.34,16.64 ccw(c-15.921,17.221) -15.1,17.221 ccw(c-14.279,17.221) R13.1@-14.86,16.64 ; R10.1@-15.34,18.06 cw(c-15.921,17.479) -15.1,17.479 cw(c-14.279,17.479) R10.1@-14.86,18.06
NetR11_1: R11.1 R12.1 U5.7 | length 10.7
  Top Layer w0.2: U5.7@-18.75,18.935 -16.365,18.935 R11.1@-15.1,20.2 R12.1@-15.1,22.1 ; U5.7@-17.959,18.794 cw(c-17.617,18.452) -17.617,18.935 cw(c-17.617,19.418) U5.7@-17.959,19.076 ; R11.1@-15.44,20.2 cw(c-16.261,20.2) -15.68,19.62 cw(c-15.1,19.039) R11.1@-15.1,19.86 ; R11.1@-15.34,20.44 ccw(c-15.921,21.021) -15.1,21.021 ccw(c-14.279,21.021) R11.1@-14.86,20.44 ; R12.1@-15.34,21.86 cw(c-15.921,21.279) -15.1,21.279 cw(c-14.279,21.279) R12.1@-14.86,21.86
NetR21_1: R21.1 U35.3 U39.3 U39.4 | length 48.5
  Top Layer w0.2: U39.3@26.94,12 U39.4@28.21,12 ; U39.3@27.081,11.859 cw(c27.423,11.517) 27.423,12 cw(c27.423,12.483) U39.3@27.081,12.141 ; U39.4@28.069,11.159 cw(c27.727,10.817) 28.21,10.817 cw(c28.693,10.817) U39.4@28.351,11.159 ; U39.4@28.069,11.859 ccw(c27.727,11.517) 27.727,12 ccw(c27.727,12.483) U39.4@28.069,12.141 ; U39.4@28.069,12.841 ccw(c27.727,13.183) 28.21,13.183 ccw(c28.693,13.183) U39.4@28.351,12.841 ; 28.377,0.883 ccw(c28.827,1.334) U35.3@29.198,0.816 ; 28.543,0.717 ccw(c28.966,1.139) U35.3@29.314,0.653 ; U35.3@28.71,0.55 ccw(c29.105,0.945) U35.3@29.431,0.491 ; U35.3@29.082,0.978 cw(c28.688,1.528) 28.21,1.05 ; U35.3@29.46,-0.2 28.21,1.05 ; R21.1@41.834,25.06 cw(c41.834,24.178) 42.458,24.802 ; R21.1@41.847,25.413 43.713,23.546 43.713,20.422 39.345,16.053 28.924,16.053 28.21,15.339 U39.4@28.21,12 ; R21.1@42.174,25.4 ccw(c42.933,25.4) 42.396,24.863 ; 28.21,1.05 U39.4@28.21,12
NetR22_1: R22.1 U36.3 U39.1 U39.2 | length 49.8
  Top Layer w0.2: U36.3@23.9,0.91 ccw(c22.791,2.019) 24.36,2.019 ccw(c25.929,2.019) U36.3@24.82,0.91 ; U36.3@24.042,0.768 ccw(c23.274,1.536) 24.36,1.536 ccw(c25.446,1.536) U36.3@24.678,0.768 ; U39.1@24.259,11.859 ccw(c23.917,11.517) 23.917,12 ccw(c23.917,12.483) U39.1@24.259,12.141 ; U36.3@24.36,-0.2 24.36,5.055 23.31,6.105 23.31,11.55 23.76,12 U39.1@24.4,12 U39.2@25.67,12 25.67,14.062 28.346,16.739 36.982,16.739 38.608,18.364 38.608,22.682 37.898,23.392 36.108,23.392 R22.1@34.2,25.3 ; U39.1@24.541,11.859 cw(c24.883,11.517) 24.883,12 cw(c24.883,12.483) U39.1@24.541,12.141 ; U39.2@25.529,11.859 ccw(c25.187,11.517) 25.187,12 ccw(c25.187,12.483) U39.2@25.529,12.141 ; U39.2@25.529,12.841 ccw(c25.187,13.183) 25.67,13.183 ccw(c26.153,13.183) U39.2@25.811,12.841 ; R22.1@34.2,24.96 cw(c34.2,24.139) 34.78,24.72 cw(c35.361,25.3) R22.1@34.54,25.3
NetR70_2: R70.2 U33.2 | length 16.3
  Top Layer w0.4: U33.2@34.56,8.4 35.941,7.019 ; U33.2@34.619,7.612 cw(c34.942,6.856) 35.523,7.437 ; U33.2@34.776,7.244 cw(c35.192,6.27) 35.941,7.019 ; R70.2@35.771,-4.02 ccw(c35.362,-3.61) 35.941,-3.61 ccw(c36.52,-3.61) R70.2@36.111,-4.02 ; R70.2@35.941,-4.19 35.941,7.019
NetR71_2: R71.2 U32.2 | length 16
  Top Layer w0.4: U32.2@39.66,8.4 40.919,7.141 ; U32.2@39.734,7.62 cw(c40.071,7.032) 40.549,7.511 ; U32.2@39.933,7.273 cw(c40.34,6.561) 40.919,7.141 ; R71.2@40.75,-4.02 ccw(c40.34,-3.61) 40.919,-3.61 ccw(c41.499,-3.61) R71.2@41.089,-4.02 ; R71.2@40.919,-4.19 40.919,7.141
NetR72_2: R72.2 U31.2 | length 15.5
  Top Layer w0.4: U31.2@44.76,8.4 45.999,7.161 ; U31.2@44.837,7.621 cw(c45.174,7.06) 45.637,7.523 ; U31.2@45.043,7.278 cw(c45.446,6.607) 45.999,7.161 ; R72.2@45.83,-3.995 ccw(c45.42,-3.585) 45.999,-3.585 ccw(c46.579,-3.585) R72.2@46.169,-3.995 ; R72.2@45.999,-3.777 45.999,7.161
NetR73_2: R73.2 U30.2 | length 16.1
  Top Layer w0.4: U30.2@49.86,8.4 51.181,7.079 ; U30.2@49.926,7.615 cw(c50.257,6.945) 50.786,7.474 ; U30.2@50.103,7.257 cw(c50.518,6.416) 51.181,7.079 ; R73.2@51.011,-3.995 ccw(c50.602,-3.585) 51.181,-3.585 ccw(c51.76,-3.585) R73.2@51.351,-3.995 ; R73.2@51.181,-4.164 51.181,7.079
NetR74_2: R74.2 U35.2 | length 16.2
  Top Layer w0.4: U35.2@29.46,8.4 30.81,7.05 ; U35.2@29.523,7.614 cw(c29.85,6.902) 30.404,7.456 ; U35.2@29.69,7.25 cw(c30.106,6.346) 30.81,7.05 ; R74.2@30.666,-4.02 ccw(c30.317,-3.671) 30.81,-3.671 ; R74.2@30.81,-4.19 30.81,7.05 ; 30.81,-3.549 ccw(c31.476,-3.549) R74.2@31.005,-4.02
NetR75_2: R75.2 U36.2 | length 15.7
  Top Layer w0.4: U36.2@24.36,8.4 25.578,7.182 ; U36.2@24.44,7.623 cw(c24.778,7.089) 25.224,7.536 ; U36.2@24.654,7.285 cw(c25.051,6.656) 25.578,7.182 ; R75.2@25.455,-3.955 ccw(c25.16,-3.66) 25.578,-3.66 ; R75.2@25.578,-4.012 25.578,7.182 ; 25.578,-3.432 ccw(c26.319,-3.432) R75.2@25.795,-3.955
NetU30_3: U30.3 U34.7 U34.8 | length 21.1
  Top Layer w0.2: U34.7@44.32,12 U34.8@45.59,12 45.59,10.792 46.07,10.312 48.184,10.312 48.692,9.804 48.692,0.968 ; U34.7@44.461,11.859 cw(c44.803,11.517) 44.803,12 cw(c44.803,12.483) U34.7@44.461,12.141 ; U34.8@45.449,11.159 cw(c45.107,10.817) 45.59,10.817 cw(c46.073,10.817) U34.8@45.731,11.159 ; U34.8@45.449,11.859 ccw(c45.107,11.517) 45.107,12 ccw(c45.107,12.483) U34.8@45.449,12.141 ; 48.844,0.816 ccw(c49.219,1.191) U30.3@49.565,0.79 ; 48.996,0.664 ccw(c49.36,1.028) U30.3@49.696,0.639 ; U30.3@49.435,0.941 cw(c49.078,1.354) 48.692,0.968 ; U30.3@49.86,-0.2 48.692,0.968
NetU31_3: U31.3 U34.5 U34.6 | length 20
  Top Layer w0.2: U34.5@41.78,12 U34.6@43.05,12 43.05,10.124 43.485,9.689 43.485,1.075 ; U34.5@41.921,11.859 cw(c42.263,11.517) 42.263,12 cw(c42.263,12.483) U34.5@41.921,12.141 ; U34.6@42.909,11.159 cw(c42.567,10.817) 43.05,10.817 cw(c43.533,10.817) U34.6@43.191,11.159 ; U34.6@42.909,11.859 ccw(c42.567,11.517) 42.567,12 ccw(c42.567,12.483) U34.6@42.909,12.141 ; 43.656,0.904 ccw(c44.131,1.379) U31.3@44.508,0.823 ; 43.827,0.733 ccw(c44.269,1.175) U31.3@44.62,0.657 ; 43.999,0.561 ccw(c44.408,0.97) U31.3@44.732,0.491 ; U31.3@44.396,0.988 cw(c43.993,1.583) 43.485,1.075 ; U31.3@44.76,-0.2 43.485,1.075